# EAGLE board Task2 (EAGLE 9.7.0)

Size 225.28 x 145.1 mm. Coordinates in mm from the lower left corner, seen from the top.
Outline: 0,0 225.28,0 225.28,145.1 0,145.1 0,0
Copper layers (1*16): Top 0.035mm / dielectric 1.5mm / Bottom 0.035mm
Design rules "default": minimum track width 6mil, minimum drill 0.35mm, track to track 6mil, track to pad 6mil, pad to pad 6mil, via to via 6mil, smd to smd 6mil, copper to edge 40mil, drill to drill 6mil, minimum pad ring 10mil, minimum via ring 8mil, stop-mask expansion 4mil, vias tented up to drill 0mil, thermal gap 10mil

## Footprints (pad centres in the part's own frame; a part is rotated, then mirrored left to right if it is on the bottom)
LEDRD254W60D565H860B = drill 0.981 pad 1.581: 1 -1.27,0; 2 1.27,0
HC-SR04 = drill 1.016 long: 1 -3.81,0; 2 -1.27,0; 3 1.27,0; 4 3.81,0
28027 = drill 1.016 long: 1 -2.54,0; 2 0,0; 3 2.54,0
RESAD1016W63L850D250B = drill 0.83 pad 1.43: 1 -5.08,0; 2 5.08,0
HA-06-SM065 = drill 1 pad 1.676: 1 -2.54,-2.54; 2 0,2.54; 3 2.54,-2.54
SWITCH-MOMENTARY-PTH-6.5MM = drill 1.016 pad 1.88: 1 -3.251,2.261; 2 3.251,2.261; 3 -3.251,-2.261; 4 3.251,-2.261
ARDUINO-UNO-R3-SHIELD = drill 1.016 pad 1.88: 3.3V 24.13,-2.54; 5V 24.13,0; A0 24.13,12.7; A1 24.13,15.24; A2 24.13,17.78; A3 24.13,20.32; A4 24.13,22.86; A5 24.13,25.4; AREF -24.13,-13.97; D2 -24.13,20.32; D3 -24.13,17.78; D4 -24.13,15.24; D5 -24.13,12.7; D6 -24.13,10.16; D7 -24.13,7.62; D8 -24.13,3.81; D9 -24.13,1.27; D10 -24.13,-1.27; D11 -24.13,-3.81; D12 -24.13,-6.35; D13 -24.13,-8.89; GND@0 24.13,2.54; GND@1 24.13,5.08; GND@2 -24.13,-11.43; IOREF 24.13,-7.62; NC 24.13,-10.16; RES 24.13,-5.08; RX -24.13,25.4; SCL -24.13,-19.05; SDA -24.13,-16.51; TX -24.13,22.86; VIN 24.13,7.62
JHD-162A = drill 1.016 long: 1 -19.05,0; 2 -16.51,0; 3 -13.97,0; 4 -11.43,0; 5 -8.89,0; 6 -6.35,0; 7 -3.81,0; 8 -1.27,0; 9 1.27,0; 10 3.81,0; 11 6.35,0; 12 8.89,0; 13 11.43,0; 14 13.97,0; 15 16.51,0; 16 19.05,0

## Placement (x,y rotation side)
D3  RED  [LEDRD254W60D565H860B]  87.27,129.74 180 top
DIST1  DISTANCE-SENSOR-4PINHC-SR04  [HC-SR04]  26.04,120.68 0 top
PIR1  PIR-SENSOR_28027  [28027]  204.32,138.75 0 top
R12  220  [RESAD1016W63L850D250B]  186.48,84.76 270 top
R13  1k  [RESAD1016W63L850D250B]  88.54,121.36 90 top
RPOT3  250k  [HA-06-SM065]  145.84,59.36 0 top
S5  SWITCH_MOMENTARY  [SWITCH-MOMENTARY-PTH-6.5MM]  79.65,127.14 90 top
U9  ARDUINO-UNO-R3-SHIELD  [ARDUINO-UNO-R3-SHIELD]  82.67,69.44 270 top
U10  LCD-16X2JHD-162A  [JHD-162A]  167.43,36.63 0 top

## Library data of the parts
D3 = Tinkercad; CATEGORY: Opto-Electronic; SUB-CATEGORY: LED; VALUE: LED_RED
DIST1 PIR1 R12 R13 RPOT3 S5 U9 U10 = Tinkercad

## Nets
D3_A: D3.1 R13.2
U9_5V: DIST1.1 PIR1.2 R12.1 RPOT3.1 U9.5V U10.2
U9_D2: S5.3 U9.D2
U9_D3: PIR1.1 U9.D3
U9_D4: U9.D4 U10.14
U9_D5: U9.D5 U10.13
U9_D6: U9.D6 U10.12
U9_D7: U9.D7 U10.11
U9_D8: R13.1 U9.D8
U9_D9: DIST1.3 U9.D9
U9_D10: DIST1.2 U9.D10
U9_D11: U9.D11 U10.6
U9_D12: U9.D12 U10.4
U9_GND: D3.2 DIST1.4 PIR1.3 RPOT3.3 S5.1 U9.GND@0 U9.GND@1 U9.GND@2 U10.1 U10.5 U10.16
U10_LED+: R12.2 U10.15
U10_VO: RPOT3.2 U10.3

## Tracks (layer width: path | path; a pad name or v marks a point on that pad's centre or on a via)
D3_A  (1 unrouted)
U9_5V  (5 unrouted)
U9_D2  (1 unrouted)
U9_D3  (1 unrouted)
U9_D4  (1 unrouted)
U9_D5  (1 unrouted)
U9_D6  (1 unrouted)
U9_D7  (1 unrouted)
U9_D8  (1 unrouted)
U9_D9  (1 unrouted)
U9_D10  (1 unrouted)
U9_D11  (1 unrouted)
U9_D12  (1 unrouted)
U9_GND  (10 unrouted)
U10_LED+  (1 unrouted)
U10_VO  (1 unrouted)